# EAGLE board ref-gen-board (EAGLE 7.7.0)
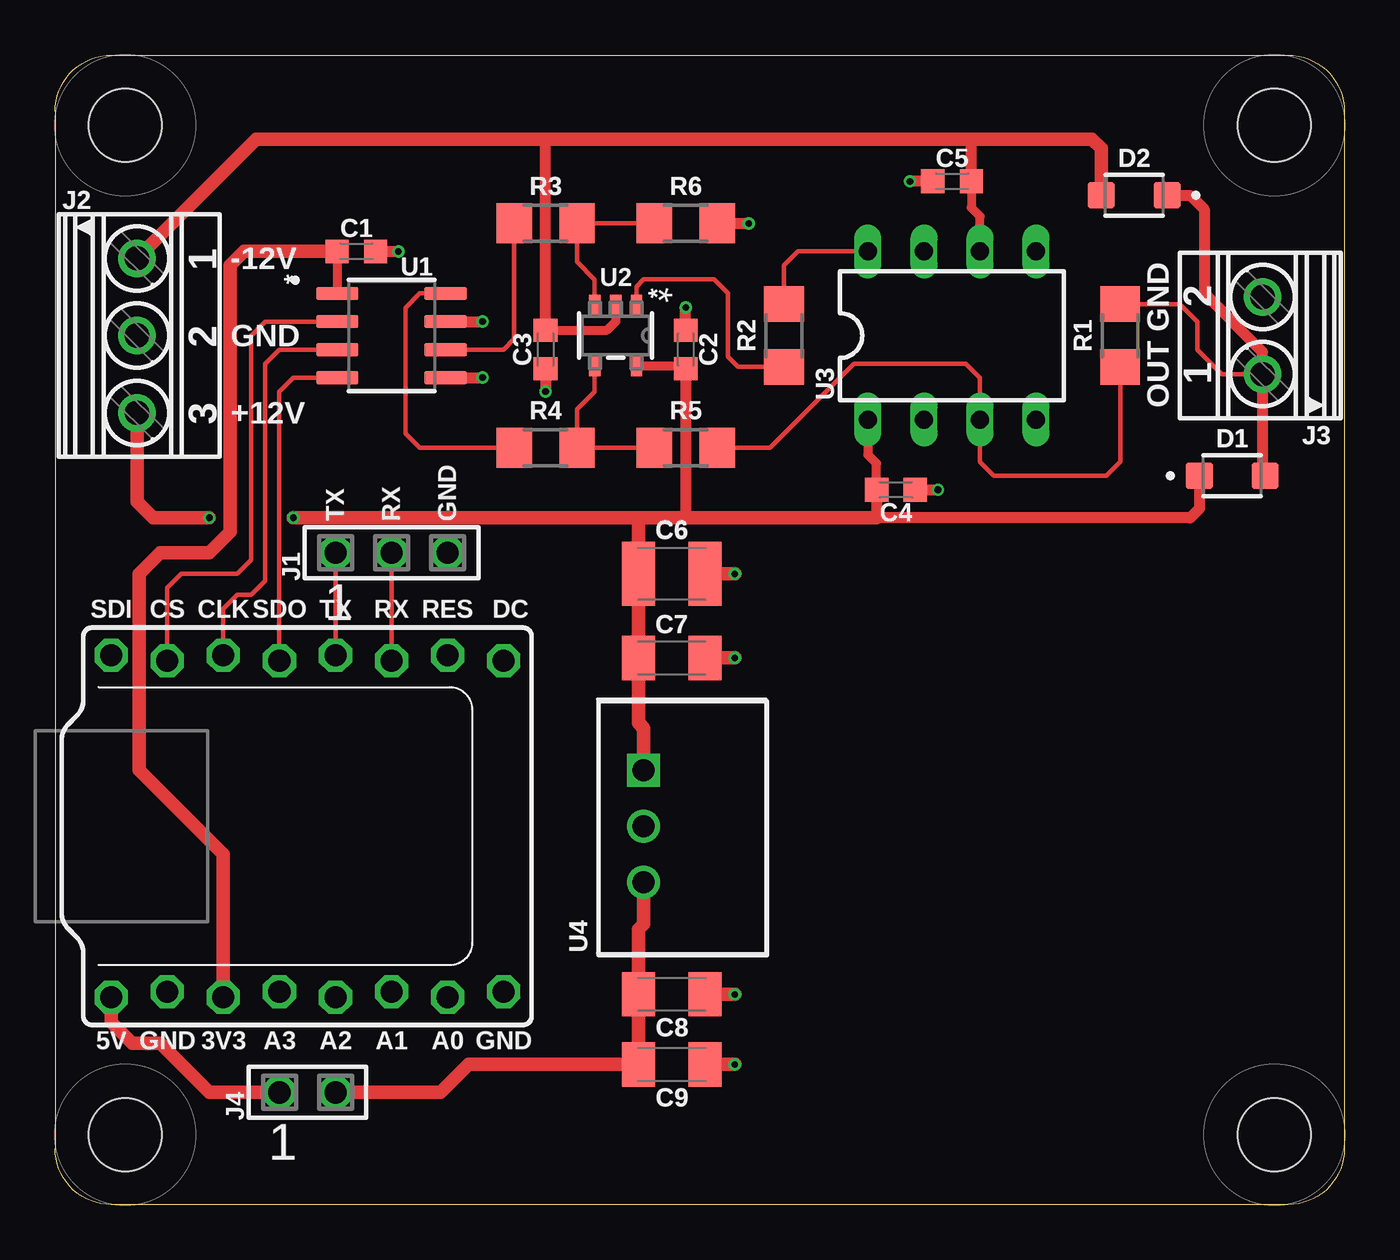
[diagram p0: board, top side]
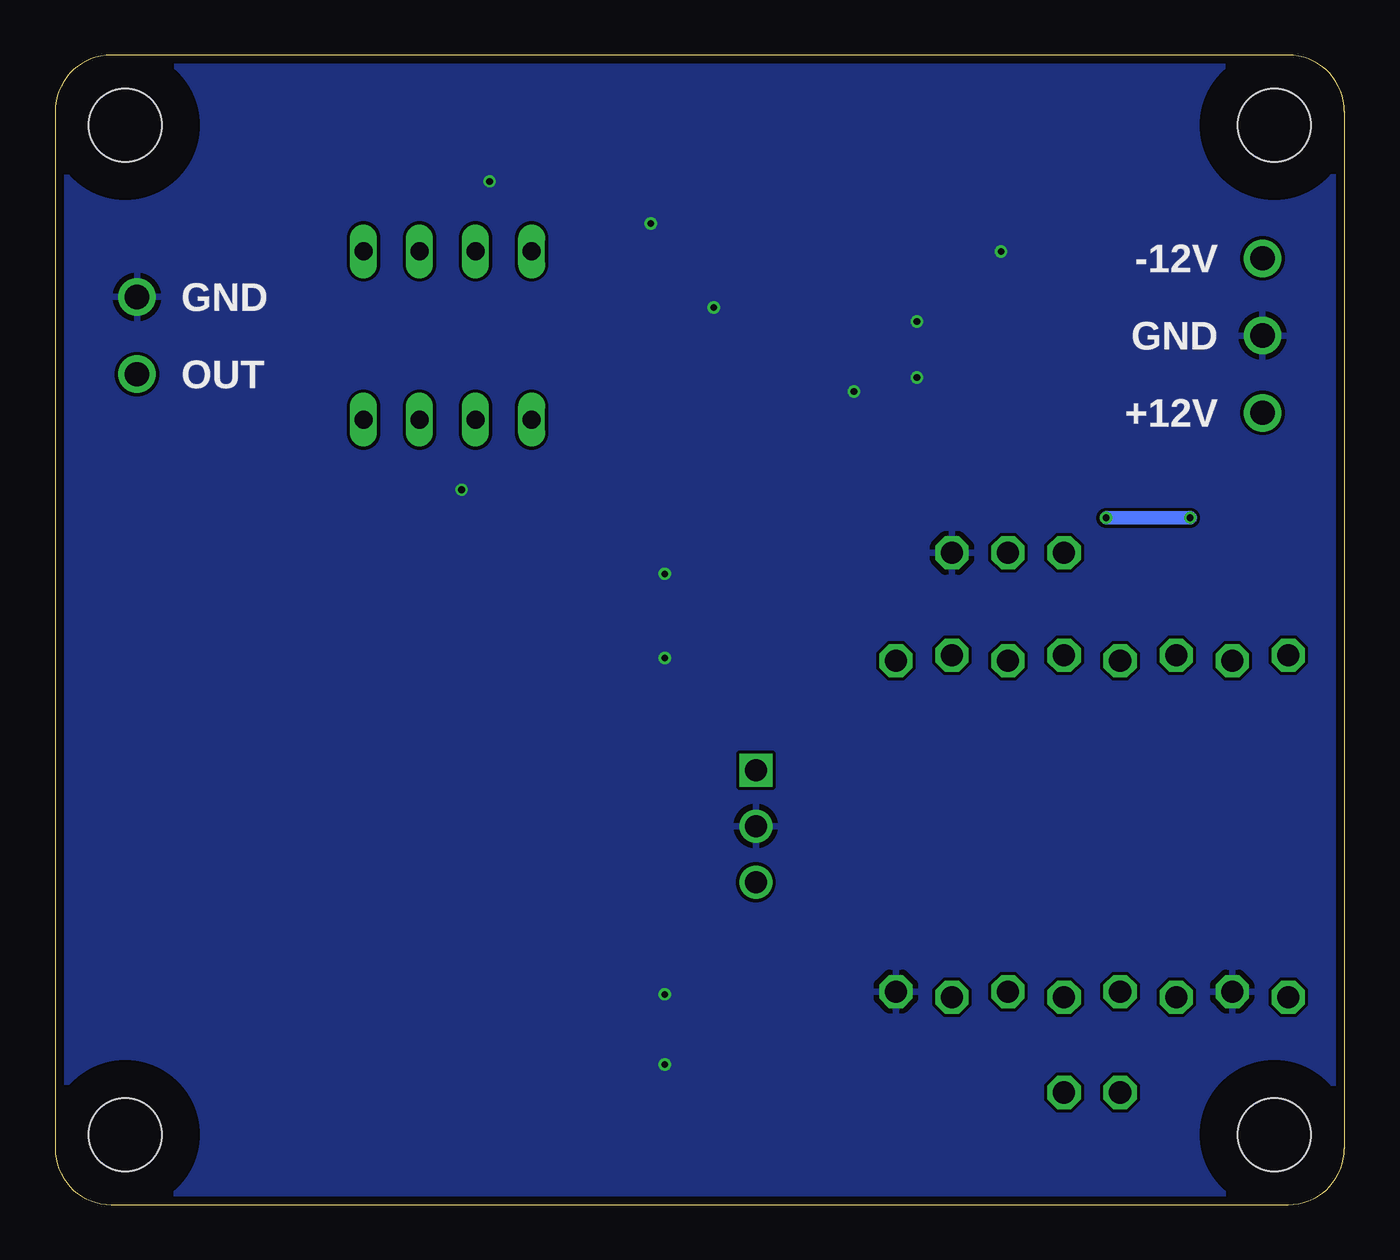
[diagram p1: board, bottom side, seen from below]

Size 58.42 x 52.07 mm. Coordinates in mm from the lower left corner, seen from the top.
Outline: 0,49.53 arc-90 2.54,52.07 55.88,52.07 arc-90 58.42,49.53 58.42,2.54 arc-90 55.88,0 2.54,0 arc-90 0,2.54 0,49.53
Copper layers (1*16): Top 0.035559375mm / dielectric 1.6mm / Bottom 0.035559375mm
Design rules "oshpark-2layer-2018": minimum track width 6mil, minimum drill 10mil, track to track 6mil, track to pad 6mil, pad to pad 6mil, via to via 6mil, smd to smd 6mil, copper to edge 15mil, drill to drill 6mil, minimum pad ring 5mil, minimum via ring 5mil, stop-mask expansion 2.5mil, vias tented up to drill 0mil, thermal gap 10mil
Holes 3.3 mm at 3.17,3.17 3.17,48.9 55.24,48.9 55.24,3.17
tRestrict: area 0,0 to 6.4,6.4; area 0,45.7 to 6.4,52.1; area 52,45.7 to 58.4,52.1; area 52,0 to 58.4,6.4
bRestrict: area 0,0 to 6.4,6.4; area 0,45.7 to 6.4,52.1; area 52,45.7 to 58.4,52.1; area 52,0 to 58.4,6.4

## Footprints (pad centres in the part's own frame; a part is rotated, then mirrored left to right if it is on the bottom)
TINY2040_PTH_LOCK = drill 1 octagon: 0 1.27,7.747; 1 3.81,7.493; 2 6.35,7.747; 3 8.89,7.493; 3V3 6.35,-7.747; 4 11.43,7.747; 5 13.97,7.493; 5V 1.27,-7.747; 6 16.51,7.747; 7 19.05,7.493; A0 16.51,-7.747; A1 13.97,-7.493; A2 11.43,-7.747; A3 8.89,-7.493; GND1 3.81,-7.493; GND2 19.05,-7.493
C0603K = smd 1.05 x 1.08: 1 -0.875,0; 2 0.875,0
C1210K = smd 1.5 x 2.9: 1 -1.5,0; 2 1.5,0
C1206K = smd 1.5 x 2: 1 -1.5,0; 2 1.5,0
SODFL3618X110N = smd 1.24 x 1.22: A 1.49,0; C -1.49,0
SSW-103-02-S-S = drill 1 pad 1.5 octagon: 1 -2.54,0; 2 0,0; 3 2.54,0
1751251 = drill 1.1 pad 1.7: 1 -3.5,-0.1; 2 0,-0.1; 3 3.5,-0.1
1751248 = drill 1.1 pad 1.7: 1 -1.75,-0.1; 2 1.75,-0.1
SSW-102-02-S-S = drill 1 pad 1.5 octagon: 1 -1.27,0; 2 1.27,0
R1206 = smd 1.6 x 1.803: 1 -1.422,0; 2 1.422,0
SOIC127P600X175-8N = smd 1.9 x 0.6: 1 -2.455,1.905; 2 -2.455,0.635; 3 -2.455,-0.635; 4 -2.455,-1.905; 5 2.455,-1.905; 6 2.455,-0.635; 7 2.455,0.635; 8 2.455,1.905
SOT-23-5_DBV_TEX = smd 0.978 x 0.508: 1 -1.365,0.95; 2 -1.365,0; 3 -1.365,-0.95; 4 1.365,-0.95; 5 1.365,0.95
DIL08 = drill 0.813 long: 1 -3.81,-3.81; 2 -1.27,-3.81; 3 1.27,-3.81; 4 3.81,-3.81; 5 3.81,3.81; 6 1.27,3.81; 7 -1.27,3.81; 8 -3.81,3.81
CUI-78XX-500 = drill 1 square: 1 0,0 | drill 1: 2 2.54,0; 3 5.08,0

## Placement (x,y rotation side)
A1  TINY2040PTHLOCK  [TINY2040_PTH_LOCK]  1.27,17.14 0 top
C1  0.1uF  [C0603K]  13.65,43.18 0 top
C2  0.1uF  [C0603K]  28.57,38.73 90 top
C3  0.1uF  [C0603K]  22.23,38.73 90 top
C4  0.1uF  [C0603K]  38.1,32.38 0 top
C5  0.1uF  [C0603K]  40.64,46.35 0 top
C6  10uF 50V  [C1210K]  27.94,28.57 0 top
C7  0.1uF 50V  [C1206K]  27.94,24.77 0 top
C8  22uF 10V  [C1206K]  27.94,9.53 0 top
C9  0.1uF 50V  [C1206K]  27.94,6.35 0 top
D1  DSS110UTR  [SODFL3618X110N]  53.34,33.02 0 top
D2  DSS110UTR  [SODFL3618X110N]  48.9,45.72 180 top
J1  SSW-103-02-S-S  [SSW-103-02-S-S]  15.24,29.53 0 top
J2  1751251  [1751251]  3.81,39.37 270 top
J3  1751248  [1751248]  54.61,39.37 90 top
J4  SSW-102-02-S-S  [SSW-102-02-S-S]  11.43,5.08 0 top
R1  0  [R1206]  48.26,39.37 90 top
R2  0  [R1206]  33.02,39.37 90 top
R3  10k  [R1206]  22.23,44.45 0 top
R4  10k  [R1206]  22.23,34.29 0 top
R5  100k  [R1206]  28.57,34.29 0 top
R6  100k  [R1206]  28.57,44.45 0 top
U1  MCP4802-E/SN  [SOIC127P600X175-8N]  15.24,39.37 0 top
U2  TL081HIDBVR  [SOT-23-5_DBV_TEX]  25.4,39.37 270 top
U3  LT1010CN8  [DIL08]  40.64,39.37 0 top
U4  CUI-V7805-500  [CUI-78XX-500]  26.67,19.68 270 top

## Library data of the parts
A1 = pimoroni-boards
C1-C5 = rcl; MFR: KEMET; MFR_PART_NO: C1206C104K5RACAUTO
C6 = rcl; MFR: KEMET; MFR_PART_NO: C1210C106K5RACTU
C7 C9 = rcl; MFR: KEMET; MFR_PART_NO: C1206S104M5RACTU
C8 = rcl; MFR: KEMET; MFR_PART_NO: C1206C226K8RAC7800
D1 D2 = DSS110UTR; DESCRIPTION: Diode Schottky 100 V 1A Surface Mount SOD-123FL; MF: SMC Diode Solutions; MP: DSS110UTR; PACKAGE: SOD-123F SMC Diode Solutions; PURCHASE-URL: https://pricing.snapeda.com/search/part/DSS110UTR/?ref=eda
J1 = con-samtec; MPN: SSW-103-02-S-S; OC_FARNELL: unknown; OC_NEWARK: 11P9367
J2 J3 = con-phoenix-350; OC_FARNELL: unknown; OC_NEWARK: unknown
J4 = con-samtec; MPN: SSW-102-02-S-S; OC_FARNELL: unknown; OC_NEWARK: 11P9351
R1-R6 = rcl
U1 = MCP4802-E_SN; DESCRIPTION: DAC 2-CH Resistor-String 8-bit Automotive 8-Pin SOIC N Tube; DIGI-KEY_PART_NUMBER: MCP4802-E/SN-ND; MF: Microchip Technology; MP: MCP4802-E/SN; PACKAGE: SOIC-8 Microchip Technology; PURCHASE-URL: https://pricing.snapeda.com/search/part/MCP4802-E/SN/?ref=eda
U2 = ul_TL081HIDBVR; COPYRIGHT: Copyright (C) 2022 Ultra Librarian. All rights reserved.; DIGI-KEY_PART_NUMBER_1: 296-TL081HIDBVRTR-ND; DIGI-KEY_PART_NUMBER_2: 296-TL081HIDBVRCT-ND; DIGI-KEY_PART_NUMBER_3: 296-TL081HIDBVRDKR-ND; MANUFACTURER_PART_NUMBER: TL081HIDBVR; MFR_NAME: Texas Instruments
U3 U4 = GlenPartsLibrary

## Nets
+: R3.2 R6.1 U2.3
+3V3: A1.3V3 C1.1 U1.1
+5V: C8.1 C9.1 J4.2 U4.3
+12V: C2.1 C4.1 C6.1 C7.1 D1.C J2.3 U2.5 U3.1 U4.1
-: R4.2 R5.1 U2.4
-12V: C3.2 C5.2 D2.A J2.1 U2.2 U3.6
/CS: A1.1 U1.2
DAC1_OUTA_OFFSET: R4.1 U1.8
DAC1_OUTB_AMPL: R3.1 U1.6
GND: A1.GND1 A1.GND2 C1.2 C2.2 C3.1 C4.2 C5.1 C6.2 C7.2 C8.2 C9.2 J1.3 J2.2 J3.2 R6.2 U1.5 U1.7 U4.2
N$1: R2.1 U2.1
N$2: D1.A D2.C J3.1 R1.2
N$3: A1.5V J4.1
N$4: R2.2 U3.8
OUT: R1.1 R5.2 U3.3
RX: A1.5 J1.2
SCK: A1.2 U1.3
SDO: A1.3 U1.4
TX: A1.4 J1.1

## Tracks (layer width: path | path; a pad name or v marks a point on that pad's centre or on a via)
+
  Top 0.203: R6.1 R3.2 23.65,42.71 24.45,41.91 U2.3
+3V3
  Top 0.203: U1.1 12.78,41.28
  Top 0.406: C1.1 12.78,41.28
  Top 0.61: C1.1 8.57,43.18 7.94,42.55 7.94,30.48 6.99,29.53 4.76,29.53 3.81,28.57 3.81,19.68 7.62,15.88 A1.3V3
+5V
  Top 0.61: U4.3 26.67,12.7 26.44,12.47 C8.1 C9.1 18.73,6.35 17.46,5.08 J4.2
+12V  (via drill 0.3)
  Top 0.406: U2.5 28.43,38.01 C2.1 | U3.1 36.83,33.97 37.23,33.58 C4.1
  Top 0.508: C2.1 28.57,31.11 | C4.1 37.23,31.11 51.44,31.11 51.85,31.53 D1.C
  Top 0.61: 37.23,31.11 28.57,31.11 26.35,31.11 | 26.35,31.11 v10.79,31.11 | U4.1 26.67,21.59 26.44,21.82 C7.1 C6.1 26.44,31.03 26.35,31.11 | J2.3 3.71,31.85 4.45,31.11 v6.99,31.11
  Bottom 0.61: v10.79,31.11 v6.99,31.11
-
  Top 0.203: R5.1 R4.2 23.65,36.03 24.45,36.83 U2.4
-12V
  Top 0.406: C3.2 25,39.61 25.4,40.01 U2.2 | U3.6 41.91,44.77 41.52,45.16 C5.2
  Top 0.508: C3.2 22.23,48.26 | C5.2 41.52,48.18 41.59,48.26
  Top 0.61: J2.1 9.1,48.26 22.23,48.26 41.59,48.26 46.99,48.26 47.41,47.84 D2.A
/CS
  Top 0.203: U1.2 9.53,40.01 8.89,39.37 8.89,29.21 8.26,28.57 5.71,28.57 5.08,27.94 A1.1
DAC1_OUTA_OFFSET
  Top 0.203: R4.1 16.51,34.29 15.88,34.92 15.88,40.64 16.51,41.27 U1.8
DAC1_OUTB_AMPL
  Top 0.203: R3.1 20.8,39.22 20.32,38.73 U1.6
GND  (via drill 0.3)
  Top 0.508: R6.2 v31.43,44.45 | C5.1 v38.73,46.35 | C4.2 v40.01,32.38 | C3.1 v22.23,36.83 | C2.2 v28.57,40.64 | U1.7 v19.37,40.01 | U1.5 v19.37,37.47 | C1.2 v15.56,43.18
  Top 0.61: C6.2 v30.8,28.57 | C7.2 v30.8,24.77 | C8.2 v30.8,9.53 | C9.2 v30.8,6.35
  pour Bottom (isolate 0.152): 0,52.07 58.42,52.07 58.42,0 0,0
N$1
  Top 0.203: U2.1 26.35,41.59 26.67,41.91 29.84,41.91 30.48,41.27 30.48,38.42 30.95,37.95 R2.1
N$2
  Top 0.203: R1.2 50.97,40.79 51.75,40.01 51.75,38.73 52.87,37.62 J3.1
  Top 0.508: D1.A 54.71,33.14 J3.1 54.71,38.63 52.07,41.27 52.07,45.09 51.44,45.72 D2.C
N$3
  Top 0.61: A1.5V 2.54,8.26 3.49,7.3 4.76,7.3 6.99,5.08 J4.1
N$4
  Top 0.203: U3.8 33.66,43.18 33.02,42.55 R2.2
OUT
  Top 0.203: R5.2 32.38,34.29 36.2,38.1 41.27,38.1 41.91,37.47 U3.3 41.91,33.66 42.55,33.02 47.62,33.02 48.26,33.66 R1.1
RX
  Top 0.203: A1.5 J1.2
SCK
  Top 0.203: U1.3 10.16,38.73 9.53,38.1 9.53,28.26 8.89,27.62 8.26,27.62 7.62,26.99 A1.2
SDO
  Top 0.203: U1.4 10.79,37.47 10.16,36.83 A1.3
TX
  Top 0.203: A1.4 J1.1

## Text on the board
_tsilk: C5 | D2 | R3 | R6 | J2 | C1 | 1 | -12V | * | U1 | U2 | * | GND | 2 | 2 | GND | C3 | C2 | R2 | R1 | OUT | 1 | 3 | +12V | R4 | R5 | U3 | J3 | D1 | C4 | TX | RX | GND | C6 | J1 | SDI | CS | CLK | SDO | TX | RX | RES | DC | C7 | U4 | 5V | GND | 3V3 | A3 | A2 | A1 | A0 | GND | C8 | C9 | J4
_bsilk: -12V | GND | GND | OUT | +12V